# EAGLE board Motor Control Hat Board (EAGLE 9.6.2)
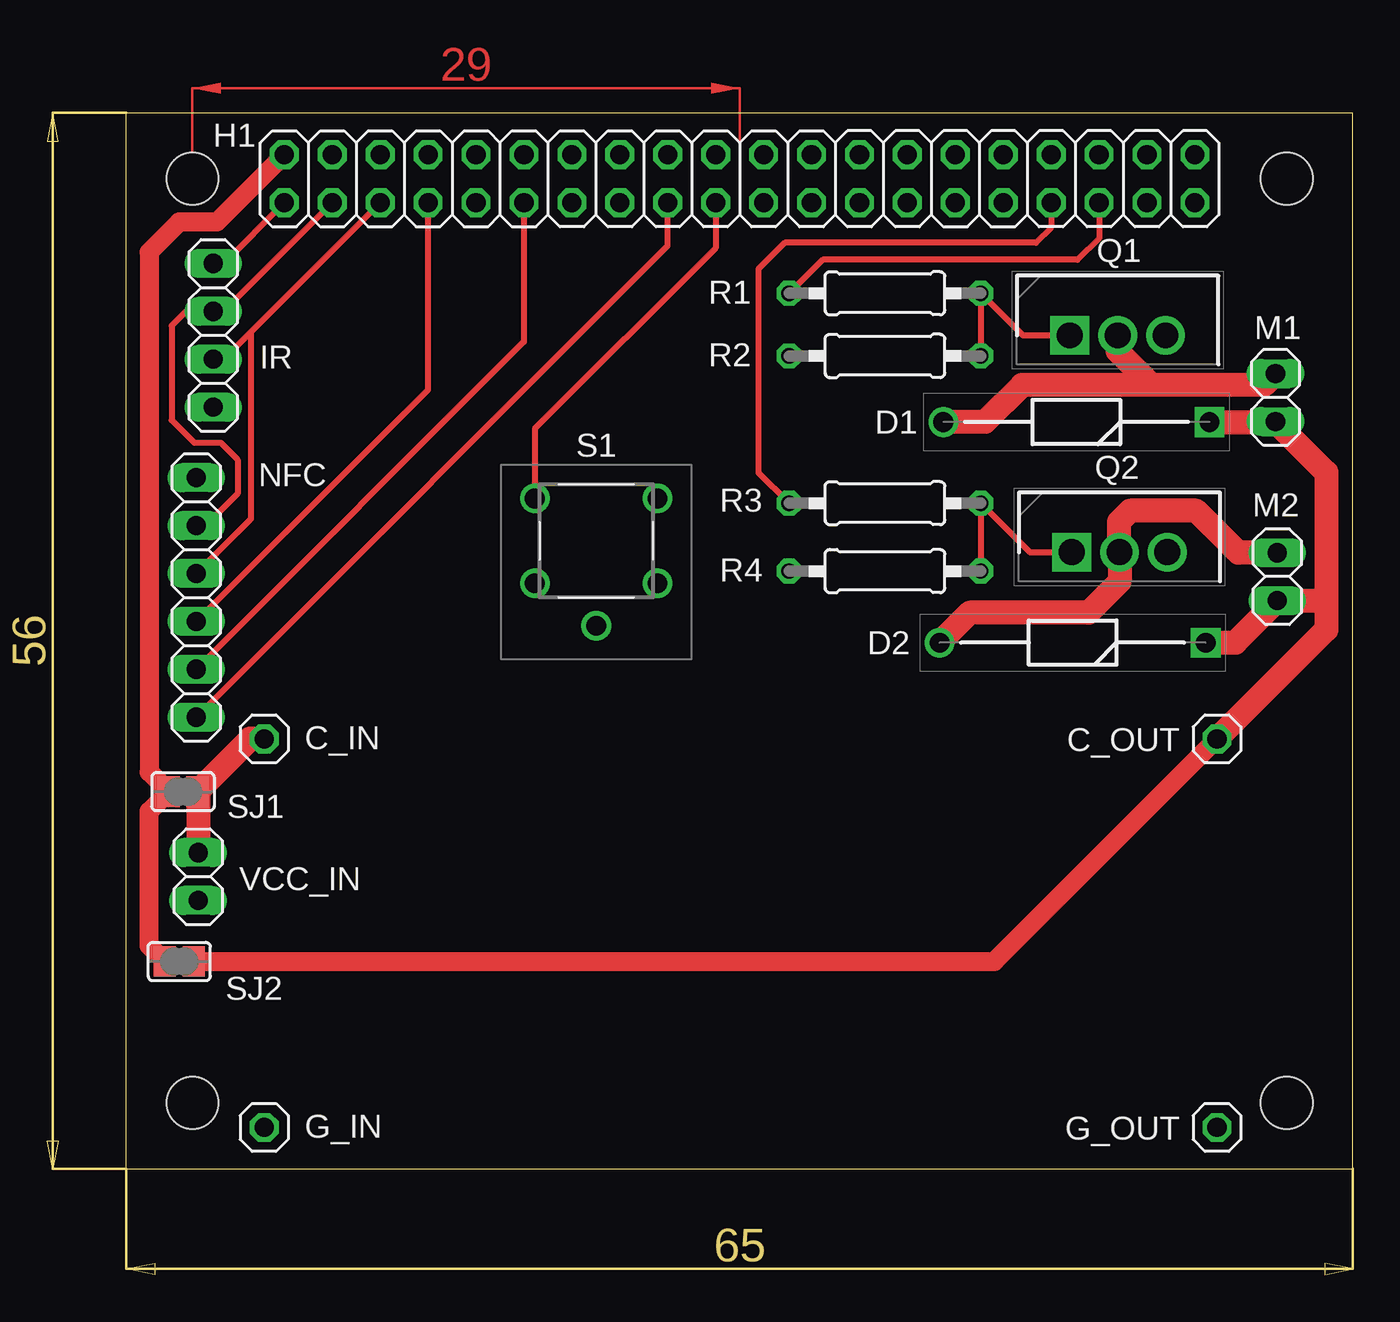
[diagram p0: board, top side]
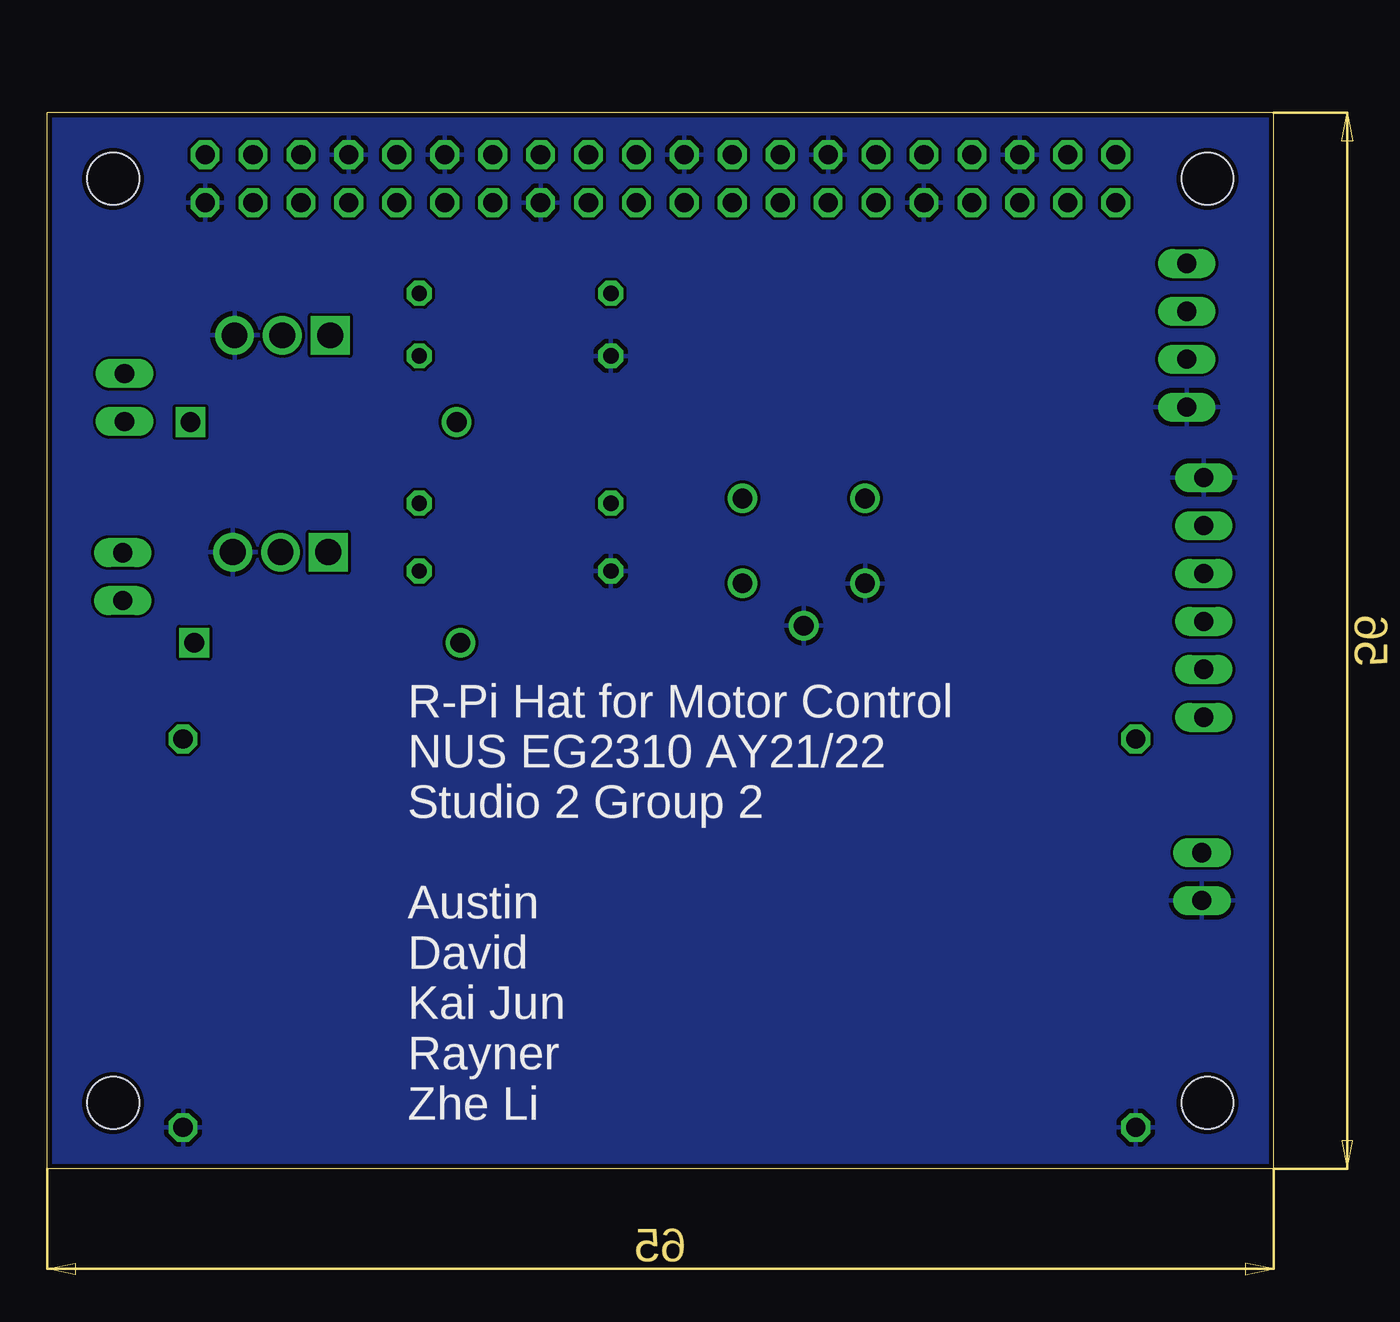
[diagram p1: board, bottom side, seen from below]

Size 65 x 56 mm. Coordinates in mm from the lower left corner, seen from the top.
Outline: 0,0 65,0 65,56 0,56 0,0
Copper layers (1*16): Top 0.035mm / dielectric 1.5mm / Bottom 0.035mm
Design rules "SeeedStudio_2layer_DRU_no_angle_20140221": minimum track width 6mil, minimum drill 12mil, track to track 6mil, track to pad 6mil, pad to pad 6mil, via to via 6mil, smd to smd 0mil, copper to edge 10mil, drill to drill 10mil, minimum pad ring 10mil, minimum via ring 6mil, stop-mask expansion 2mil, vias tented up to drill 100mil, thermal gap 10mil
Net classes: 1 USB: width 0.203 mm, drill 0.406 mm, clearance 0.203 mm; 3 usbvcc: width 0.203 mm, drill 0.406 mm, clearance 0.203 mm; 4 USBpair: width 0.254 mm, drill 0.406 mm, clearance 0.61 mm
Holes 2.75 mm at 3.5,3.5 61.5,3.5 61.5,52.5 3.5,52.5

## Footprints (pad centres in the part's own frame; a part is rotated, then mirrored left to right if it is on the bottom)
1X01 = drill 1.016 octagon: 1 0,0
DIOAD1408W86L464D236 = drill 1.05 pad 1.575 square: 1 0,0 | drill 1.05 pad 1.575: 2 14.1,0
2X20 = drill 1.016 octagon: 1 -24.13,-1.27; 2 -24.13,1.27; 3 -21.59,-1.27; 4 -21.59,1.27; 5 -19.05,-1.27; 6 -19.05,1.27; 7 -16.51,-1.27; 8 -16.51,1.27; 9 -13.97,-1.27; 10 -13.97,1.27; 11 -11.43,-1.27; 12 -11.43,1.27; 13 -8.89,-1.27; 14 -8.89,1.27; 15 -6.35,-1.27; 16 -6.35,1.27; 17 -3.81,-1.27; 18 -3.81,1.27; 19 -1.27,-1.27; 20 -1.27,1.27; 21 1.27,-1.27; 22 1.27,1.27; 23 3.81,-1.27; 24 3.81,1.27; 25 6.35,-1.27; 26 6.35,1.27; 27 8.89,-1.27; 28 8.89,1.27; 29 11.43,-1.27; 30 11.43,1.27; 31 13.97,-1.27; 32 13.97,1.27; 33 16.51,-1.27; 34 16.51,1.27; 35 19.05,-1.27; 36 19.05,1.27; 37 21.59,-1.27; 38 21.59,1.27; 39 24.13,-1.27; 40 24.13,1.27
1X04 = drill 1.016 long: 1 -3.81,0; 2 -1.27,0; 3 1.27,0; 4 3.81,0
1X02 = drill 1.016 long: 1 -1.27,0; 2 1.27,0
1X06 = drill 1.016 long: 1 -6.35,0; 2 -3.81,0; 3 -1.27,0; 4 1.27,0; 5 3.81,0; 6 6.35,0
TO254P470X1016X2019-3P = drill 1.37 pad 2.055 square: 1 0,0 | drill 1.37 pad 2.055: 2 2.535,0; 3 5.07,0
0207/10 = drill 0.813 octagon: 1 -5.08,0; 2 5.08,0
BUTT4 = drill 1.05 pad 1.575: A1 -3.25,2.25; B1 -3.25,-2.25; C1 3.25,2.25; D1 3.25,-2.25; G1 0,-4.5
SJ = smd 1.168 x 1.6: 1 -0.762,0; 2 0.762,0

## Placement (x,y rotation side)
C_IN  [1X01]  7.3,22.8 0 top
C_OUT  [1X01]  57.8,22.8 0 top
D1  1N4001-T  [DIOAD1408W86L464D236]  57.4,39.6 180 top
D2  1N4001-T  [DIOAD1408W86L464D236]  57.2,27.9 180 top
G_IN  [1X01]  7.3,2.2 0 top
G_OUT  [1X01]  57.8,2.2 0 top
H1  [2X20]  32.5,52.5 0 top
IR  [1X04]  4.6,44.2 90 top
M1  [1X02]  60.9,40.9 270 top
M2  [1X02]  61,31.4 270 top
NFC  [1X06]  3.7,30.3 90 top
Q1  FQP30N06L  [TO254P470X1016X2019-3P]  50,44.2 0 top
Q2  FQP30N06L  [TO254P470X1016X2019-3P]  50.1,32.7 0 top
R1  1000R  [0207/10]  40.2,46.43 0 top
R2  10000R  [0207/10]  40.2,43.11 0 top
R3  1000R  [0207/10]  40.2,35.3 0 top
R4  10000R  [0207/10]  40.2,31.7 0 top
S1  BUTT-4  [BUTT4]  24.9,33.3 0 top
SJ1  [SJ]  3,20 180 top
SJ2  [SJ]  2.8,11 0 top
VCC_IN  [1X02]  3.8,15.5 90 top

## Library data of the parts
C_IN C_OUT G_IN G_OUT IR M1 M2 NFC VCC_IN = pinhead
D1 D2 = SamacSys_Parts; ARROW_PART_NUMBER: 1N4001-T; ARROW_PRICE-STOCK: https://www.arrow.com/en/products/1n4001-t/diodes-incorporated?region=nac; DESCRIPTION: Diode Switching 50V 1A 2Pin DO41 Diodes Inc 1N4001-T Switching Diode, 1A 50V, 2-Pin DO-41; HEIGHT: mm; MANUFACTURER_NAME: Diodes Inc.; MANUFACTURER_PART_NUMBER: 1N4001-T; MOUSER_PART_NUMBER: 621-1N4001; MOUSER_PRICE-STOCK: https://www.mouser.co.uk/ProductDetail/Diodes-Incorporated/1N4001-T?qs=e%2FRqmsgwm9i%2FVrrtazegeg%3D%3D
H1 = pinhead; SPICEPREFIX: X
Q1 Q2 = SamacSys_Parts; ARROW_PART_NUMBER: FQP30N06L; ARROW_PRICE-STOCK: https://www.arrow.com/en/products/fqp30n06l/on-semiconductor?region=nac; DESCRIPTION: FQP30N06L N-Channel MOSFET, 32 A, 60 V QFET, 3-Pin TO-220 ON Semiconductor; HEIGHT: 4.7mm; MANUFACTURER_NAME: ON Semiconductor; MANUFACTURER_PART_NUMBER: FQP30N06L; MOUSER_PART_NUMBER: 512-FQP30N06L; MOUSER_PRICE-STOCK: https://www.mouser.co.uk/ProductDetail/ON-Semiconductor-Fairchild/FQP30N06L?qs=%252Beu4QTTVkDqugBwFplJ%252Bug%3D%3D
R1-R4 = rcl; SPICEPREFIX: R
S1 = SamacSys_Parts; DESCRIPTION: Tactile Switches MINI PUSH BUTTON SWITCH 4-PIN QTY. 4; HEIGHT: 9.5mm; MANUFACTURER_NAME: Gravitech; MANUFACTURER_PART_NUMBER: BUTT-4; MOUSER_PART_NUMBER: 992-BUTT-4; MOUSER_PRICE-STOCK: https://www.mouser.co.uk/ProductDetail/Gravitech/BUTT-4?qs=Vxac6xGyzPm51iLpy8GNew%3D%3D
SJ1 SJ2 = jumper

## Nets
B01: H1.1 IR.4
B02: H1.2 SJ1.2 SJ2.1
B07: H1.7 NFC.3
B11: H1.11 NFC.2
B17: H1.17 NFC.1
B19: H1.19 S1.A1
B33: H1.33 R3.1
B35: H1.35 R1.1
B37: H1.37
B38: H1.38
B40: H1.40
GND: G_IN.1 G_OUT.1 H1.6 H1.9 H1.14 H1.20 H1.25 H1.30 H1.34 H1.39 IR.1 NFC.6 Q1.3 Q2.3 R2.1 R4.1 S1.B1 S1.G1 VCC_IN.1
N$1: Q1.1 R1.2 R2.2
N$2: D1.2 M1.1 Q1.2
N$3: Q2.1 R3.2 R4.2
N$4: D2.2 M2.1 Q2.2
SCL: H1.5 IR.2 NFC.4
SDA: H1.3 IR.3 NFC.5
VCC: C_IN.1 SJ1.1 VCC_IN.2
VCC_5V: C_OUT.1 D1.1 D2.1 M1.2 M2.2 SJ2.2

## Tracks (layer width: path | path; a pad name or v marks a point on that pad's centre or on a via)
B01
  Top 0.305: IR.4 5.15,48.01 H1.1
B02
  Top 1.016: H1.2 4.8,50.2 2.8,50.2 1.2,48.6 1.2,21.04 SJ1.2 1.2,18.96 1.2,11.84 SJ2.1
B07
  Top 0.305: NFC.3 15.99,41.32 H1.7
B11
  Top 0.305: H1.11 21.07,43.86 NFC.2
B17
  Top 0.305: NFC.1 28.69,48.94 H1.17
B19
  Top 0.305: H1.19 31.23,48.83 21.65,39.25 S1.A1
B33
  Top 0.305: H1.33 49.01,49.91 48.2,49.1 34.9,49.1 33.5,47.7 33.5,36.92 R3.1
B35
  Top 0.305: H1.35 51.55,49.35 50.4,48.2 36.89,48.2 R1.1
GND
  pour Bottom: 0,0 65,0 65,56 0,56
N$1
  Top 0.305: R2.2 R1.2 47.51,44.2 Q1.1
N$2
  Top 1.27: M1.1 60.3,41.57 54.33,41.57 | Q1.2 52.53,43.37 54.33,41.57 | 54.33,41.57 47.47,41.57 45.5,39.6 D1.2
N$3
  Top 0.305: R4.2 R3.2 47.88,32.7 Q2.1
N$4
  Top 1.27: M2.1 58.93,32.67 56.7,34.9 53.2,34.9 52.6,34.3 52.6,32.73 Q2.2 52.63,31.14 51,29.5 44.7,29.5 D2.2
SCL
  Top 0.305: IR.2 5.15,42.93 6.61,44.39 | 6.61,44.39 H1.5 | NFC.4 6.61,34.48 6.61,44.39
SDA
  Top 0.305: H1.3 5.15,45.47 IR.3 3.17,45.47 2.4,44.7 2.4,39.7 3.6,38.5 5,38.5 5.9,37.6 5.9,35.8 4.21,34.11 NFC.5
VCC
  Top 1.27: VCC_IN.2 3.8,19.96 SJ1.1 6.56,22.8 C_IN.1
VCC_5V
  Top 1.016: C_OUT.1 46,11 SJ2.2
  Top 1.27: C_OUT.1 63.6,28.6 63.6,30.1 | 63.6,30.1 63.6,36.93 M1.2 60.87,39.6 D1.1 | 63.6,30.1 63.57,30.13 M2.2 58.77,27.9 D2.1
(copper drawn outside any net)
  shapes: Top area x1

## Text on the board
bNames: R-Pi Hat for Motor Control / NUS EG2310 AY21/22 / Studio 2 Group 2 / / Austin / David / Kai Jun / Rayner / Zhe Li